# Altium PCB FAN.PcbDoc
Units mm, origin at the board's own origin, x right, y up, seen from the top; angles counter-clockwise.
Board outline 60.32 x 25.4 mm, 2 copper layers (Top Layer, Bottom Layer); 9 components, 5 nets, 22 pads, 0 vias.
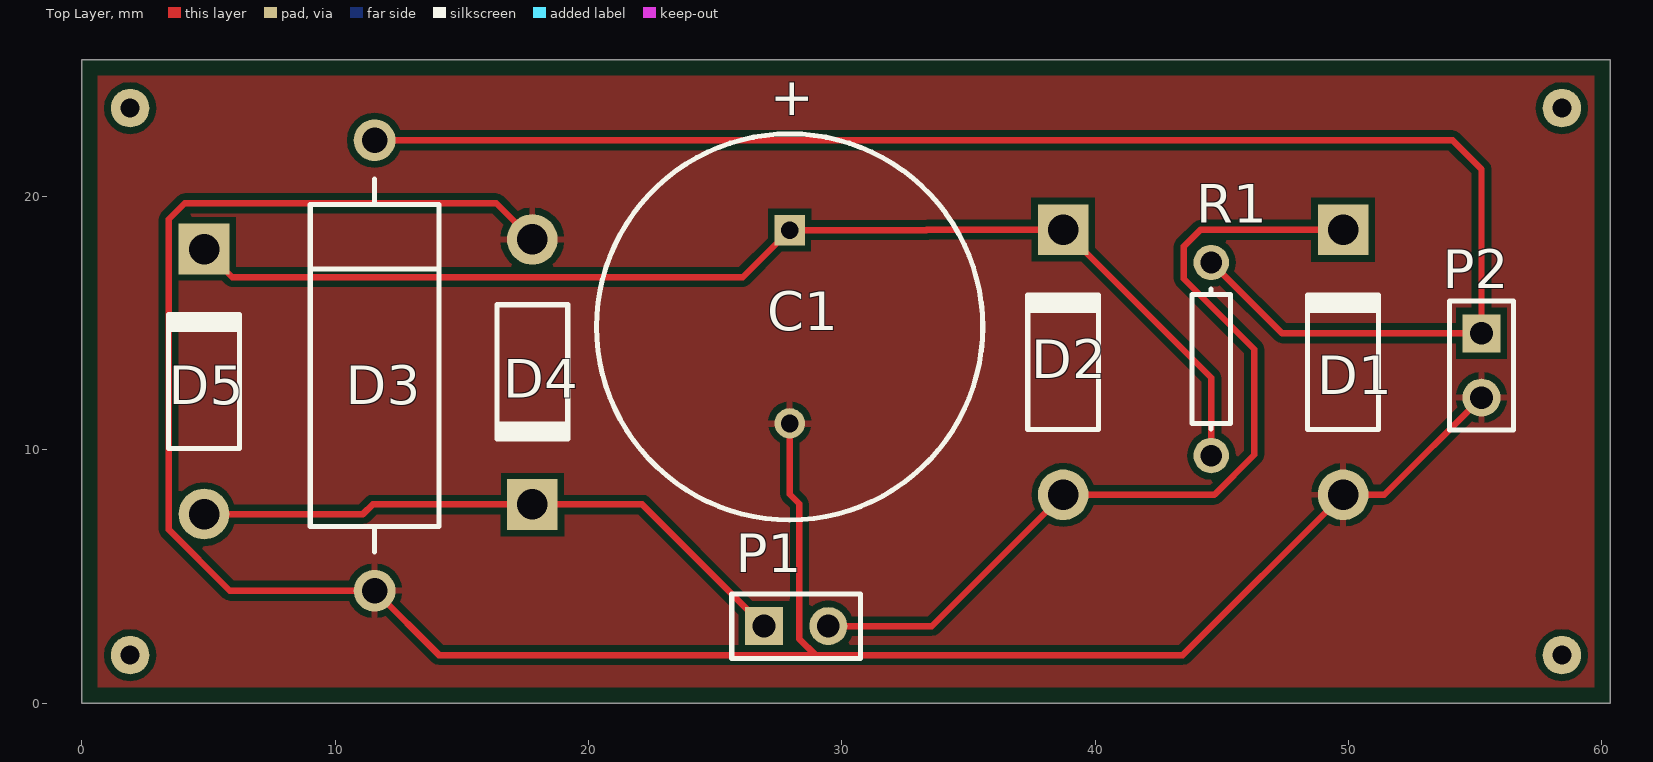
[diagram p0: Top Layer view]
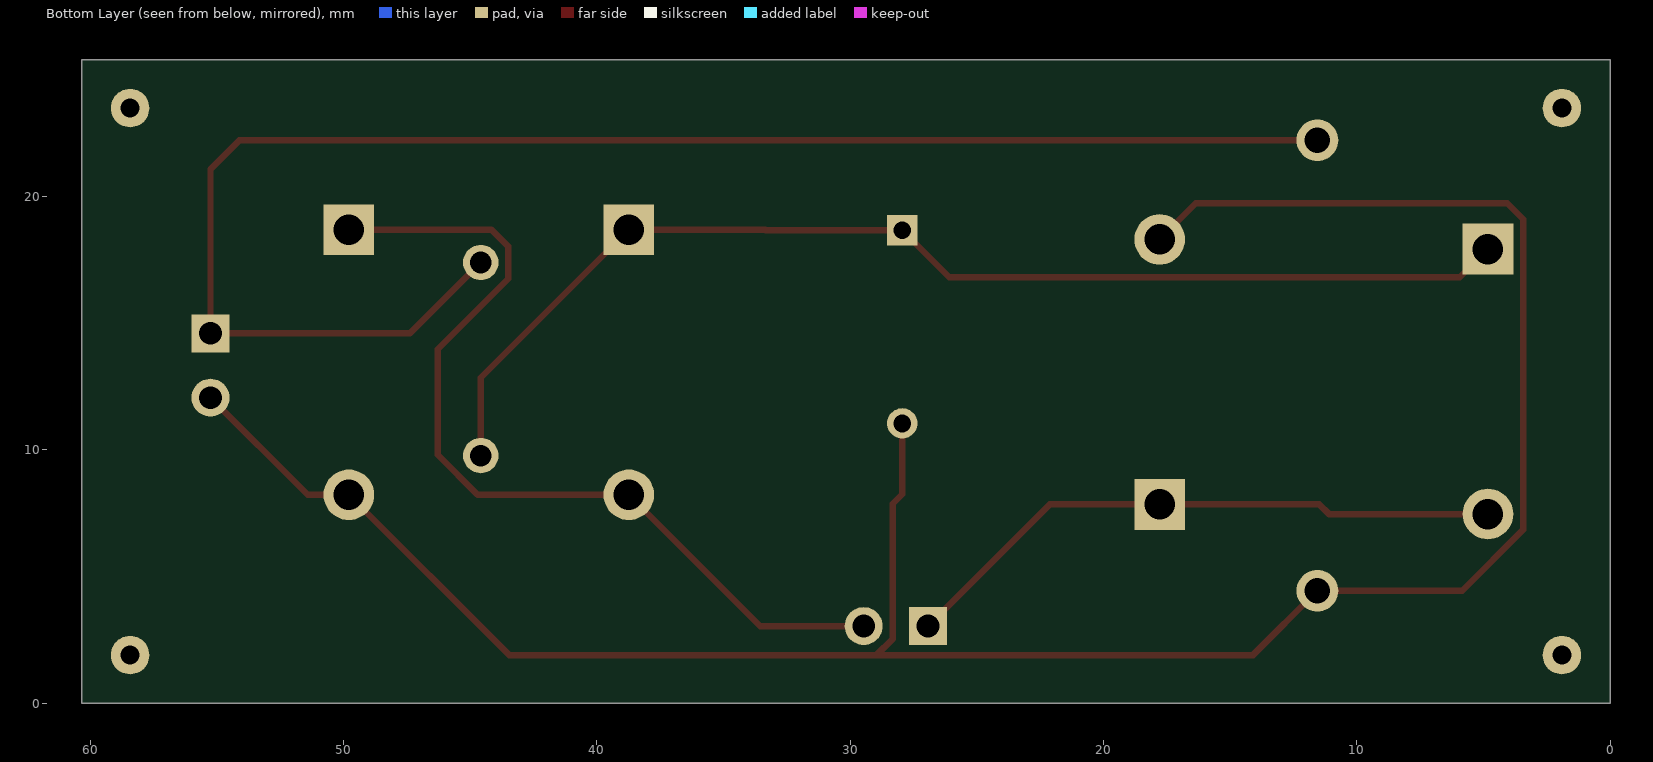
[diagram p1: Bottom Layer view, seen from below]

## Layer stack, top to bottom
Top Solder: solder mask 0.0102, Solder Resist, Dk 3.5
Top Layer: signal copper 0.0356
Dielectric 1: dielectric 0.32, FR-4, Dk 4.8
Bottom Layer: signal copper 0.0356
Bottom Solder: solder mask 0.0102, Solder Resist, Dk 3.5

## Board outline
0,0 0,25.4 60.325,25.4 60.325,0

## Design rules (kind name [scope] priority, off if disabled: settings)
Clearance [All] p1: gap=0.254 ignorepadtopadclearanceinfootprint=FALSE except(0: Arc-Hole Track-Hole SMDPad-Hole THPad-Hole Via-Hole Fill-Hole Poly-Hole Region-Hole Text-Hole)
DiffPairsRouting [All] p1: maxlimit=0.254 minlimit=0.254 mostfreqgap=0.254 toplayer_minwidth=0.381 toplayer_maxwidth=0.381 toplayer_prefwidth=0.381 bottomlayer_minwidth=0.381 bottomlayer_maxwidth=0.381 bottomlayer_prefwidth=0.381 substack1={B6F0183C-2B8B-4F92-9ECC-CD80EB5F1796} toplayer_{b6f0183c-2b8b-4f92-9ecc-cd80eb5f1796}_minwidth=0.381 toplayer_{b6f0183c-2b8b-4f92-9ecc-cd80eb5f1796}_maxwidth=0.381 toplayer_{b6f0183c-2b8b-4f92-9ecc-cd80eb5f1796}_prefwidth=0.381 bottomlayer_{b6f0183c-2b8b-4f92-9ecc-cd80eb5f1796}_minwidth=0.381 bottomlayer_{b6f0183c-2b8b-4f92-9ecc-cd80eb5f1796}_maxwidth=0.381 bottomlayer_{b6f0183c-2b8b-4f92-9ecc-cd80eb5f1796}_prefwidth=0.381 maxuncoupledlength=12.7
PolygonConnect [All] p1: connectstyle=Relief reliefconductorwidth=0.254 reliefentries=4 polygonreliefangle="90 Angle" airgapwidth=0.254
RoutingLayers [All] p1: top layer_v5=TRUE bottom layer_v5=FALSE
RoutingVias [All] p1: holewidth=0.711 width=1.27 viastyle="Through Hole" minholewidth=0.711 minwidth=1.27 maxholewidth=0.711 maxwidth=1.27
SolderMaskExpansion [All] p1: expansion=0.102 istentingtop=FALSE
Width [All] p1: maxlimit=0.292 minlimit=0.241 preferedwidth=0.254 substack1={B6F0183C-2B8B-4F92-9ECC-CD80EB5F1796}
28 further rules are at their usual default settings.

## Components (designator, comment, footprint, x,y, rotation, side; value= is the part's Value field where it differs from the comment)
C1 "Cap Pol1" RB7.6-15 27.94,14.859 r90 top value=22mF
D1 "Diode 1N4001" DO-41 49.784,13.462 r90 top
D2 "Diode 1N4001" DO-41 38.735,13.462 r90 top
D3 "D Zener" DIODE-0.7 11.557,13.335 r90 top
D4 "Diode 1N4001" DO-41 17.78,13.081 r270 top
D5 "Diode 1N4001" DO-41 4.826,12.7 r90 top
P1 "Header 2" HDR1X2 26.924,3.048 r0 top
P2 "Header 2" HDR1X2 55.245,14.605 r270 top
R1 "Res1" AXIAL-0.3 44.577,13.589 r90 top value=10

## Footprints (in the part's own frame and the unit in brackets; to place one, negate y for a bottom-side part, rotate by r counter-clockwise, add the part's x,y. Pads: shape width x height; smd on the part's side, far side on the other; paste and mask are expansions set on the pad)
AXIAL-0.3 [mm] "Axial Device, Thru-Hole; 2 Leads; 0.3 in Pin Spacing"
  round 1.4 hole 0.85: 1(-3.81,0) 2(3.81,0)
  silkscreen extent -2.77,-0.76 2.77,0.76
DIODE-0.7 [mm] "Diode, Thru-Hole; 2 Leads; 0.7 in Pin Spacing"
  round 1.65 hole 1: 1(-8.89,0) 2(8.89,0)
  silkscreen extent -7.37,-2.54 7.37,2.54
DO-41 [mm] "Diode, Axial; Body 5.2 x 2.7 mm (LxDia. max), Lead Dia. 0.86 mm (max)"
  round 2 hole 1.2: 1(-5.23,0)
  rect 2x2 hole 1.2: 2(5.23,0)
  silkscreen extent -2.65,-1.4 2.75,1.4
HDR1X2 [mm] "Connector; Header; 2 Position"
  rect 1.5x1.5 hole 0.9: 1(0,0)
  round 1.5 hole 0.9: 2(2.54,0)
  silkscreen extent -1.27,-1.27 3.81,1.27
RB7.6-15 [mm] "Polarized Capacitor (Radial); 2 Leads"
  rect 1.2x1.2 hole 0.7: 1(3.81,0)
  round 1.2 hole 0.7: 2(-3.81,0)
  silkscreen extent -7.62,-7.62 7.62,7.62

## Part data
C1: "Polarized Capacitor (Radial)", LatestRevisionDate=17-Jul-2002, LatestRevisionNote="Re-released for DXP Platform.", PackageDescription="Polarized Capacitor (Radial); 2 Leads", PackageReference=RB7.6-15, Published=8-Jun-2000, Publisher="Altium Limited"
D1 D2 D4 D5: "1 Amp General Purpose Rectifier", Code_JEDEC=DO-204-AL, ComponentLink1Description="Manufacturer Link", ComponentLink1URL=http://www.fairchildsemi.com/, ComponentLink2Description=Datasheet, ComponentLink2URL=http://www.fairchildsemi.com/ds/1N%2F1N4001.pdf, DatasheetVersion=1998, LatestRevisionDate=17-Jul-2002, LatestRevisionNote="Re-released for DXP Platform.", PackageDescription="Diode, Axial; Body 5.2 x 2.7 mm (LxDia. max), Lead Dia. 0.86 mm (max)", PackageReference=DO-41, PackageVersion=Aug-1999, Published=8-Jun-2000, Publisher="Altium Limited"
D3: "Zener Diode", LatestRevisionDate=17-Jul-2002, LatestRevisionNote="Re-released for DXP Platform.", PackageDescription="Diode, Thru-Hole; 2 Leads; 0.7 in Pin Spacing", PackageReference=DIODE-0.7, Published=8-Jun-2000, Publisher="Altium Limited"
P1 P2: "Header, 2-Pin", LatestRevisionDate=17-Jul-2002, LatestRevisionNote="Re-released for DXP Platform.", Publisher="Altium Limited"
R1: "Resistor", LatestRevisionDate=17-Jul-2002, LatestRevisionNote="Re-released for DXP Platform.", PackageDescription="Axial Device, Thru-Hole; 2 Leads; 0.3 in Pin Spacing", PackageReference=AXIAL-0.3, Published=8-Jun-2000, Publisher="Altium Limited"

## Free pads (board coordinates)
  round 1.524 hole 0.762: 2(1.905,23.495) 3(1.905,1.905) 4(58.42,1.905) 5(58.42,23.495)

## Nets (pads, with @x,y where several pads share a name; then routed paths per layer and width w, separated by ;. In a path a pad name is that pad's centre, name@x,y a point inside that pad or via, vN(x,y) a via of type N, cw(c..) or ccw(c..) an arc to the next point about the centre after c; other vN are vias at no path point)
GND: C1.2 D1.1 D3.1 D4.1 P2.2 | length 95.1
  Top Layer w0.254: D4.1 16.355,19.736 4.064,19.736 3.429,19.101 3.429,6.858 5.842,4.445 D3.1 14.097,1.905 28.956,1.905 ; C1.2 27.94,8.255 28.321,7.874 28.321,2.54 28.956,1.905 ; P2.2 51.412,8.232 D1.1 43.457,1.905 28.956,1.905
NetC1_1: C1.1 D2.2 D5.2 R1.1 | length 46.5
  Top Layer w0.254: D5.2 5.941,16.815 26.086,16.815 C1.1 33.325,18.669 33.348,18.692 D2.2 44.577,12.85 R1.1
NetD1_2: D1.2 D2.1 P1.2 | length 35.6
  Top Layer w0.254: P1.2 33.551,3.048 D2.1 44.704,8.232 46.279,9.807 46.279,13.981 43.496,16.764 43.496,18.034 44.154,18.692 D1.2
NetD4_2: D4.2 D5.1 P1.1 | length 24.2
  Top Layer w0.254: D5.1 11.1,7.47 11.481,7.851 D4.2 22.121,7.851 P1.1
VCC: D3.2 P2.1 R1.2 | length 62.5
  Top Layer w0.254: D3.2 54.102,22.225 55.245,21.082 P2.1 47.371,14.605 R1.2

## Polygon pours and split planes (outlines as drawn)
GND on Top Layer "Top Layer-No Net" (solid, pour order 2): 0.635,24.765 0.635,0.635 59.69,0.635 59.69,24.765

## Dimensions
0,25.4 to 60.325,25.4 on Top Overlay
0,25.4 to 0,0 on Top Overlay

## Text inside footprints (layer, text, board x,y; h text height)
C1: Top Overlay "+" at 28.677,22.991 h1.5 r90